# EAGLE board e-ink-display-v120 (EAGLE 9.2.2)
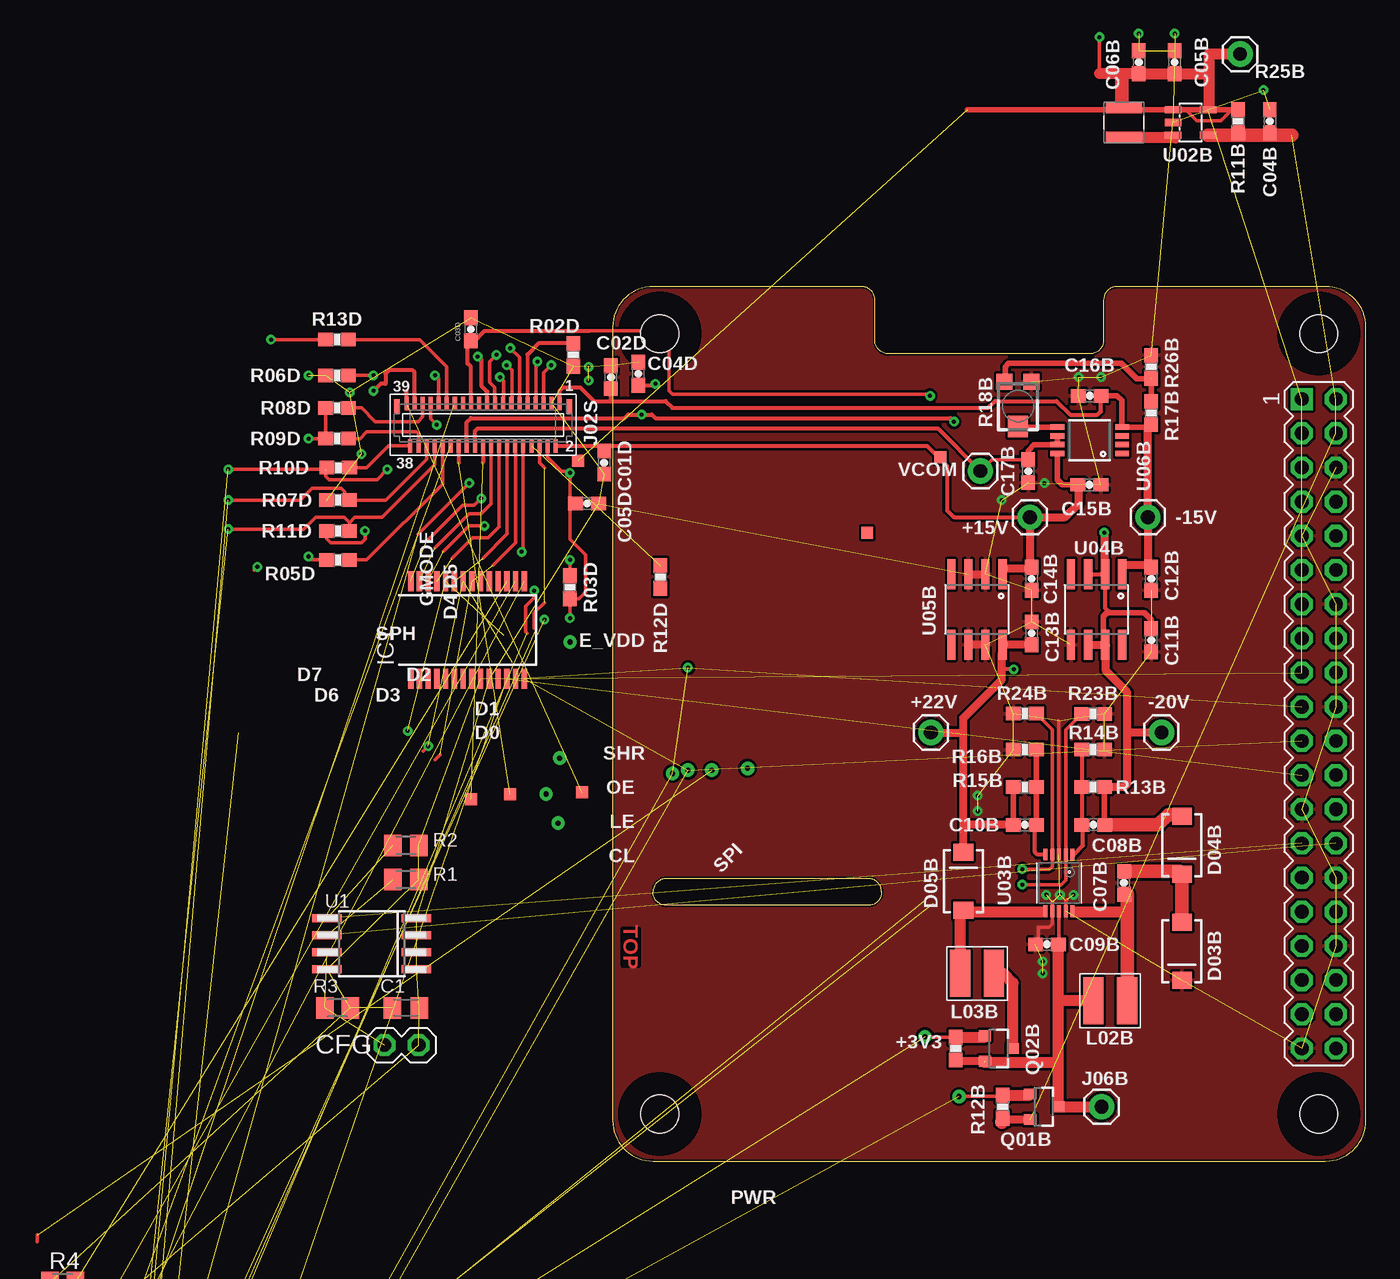
[diagram p0: board, top side]
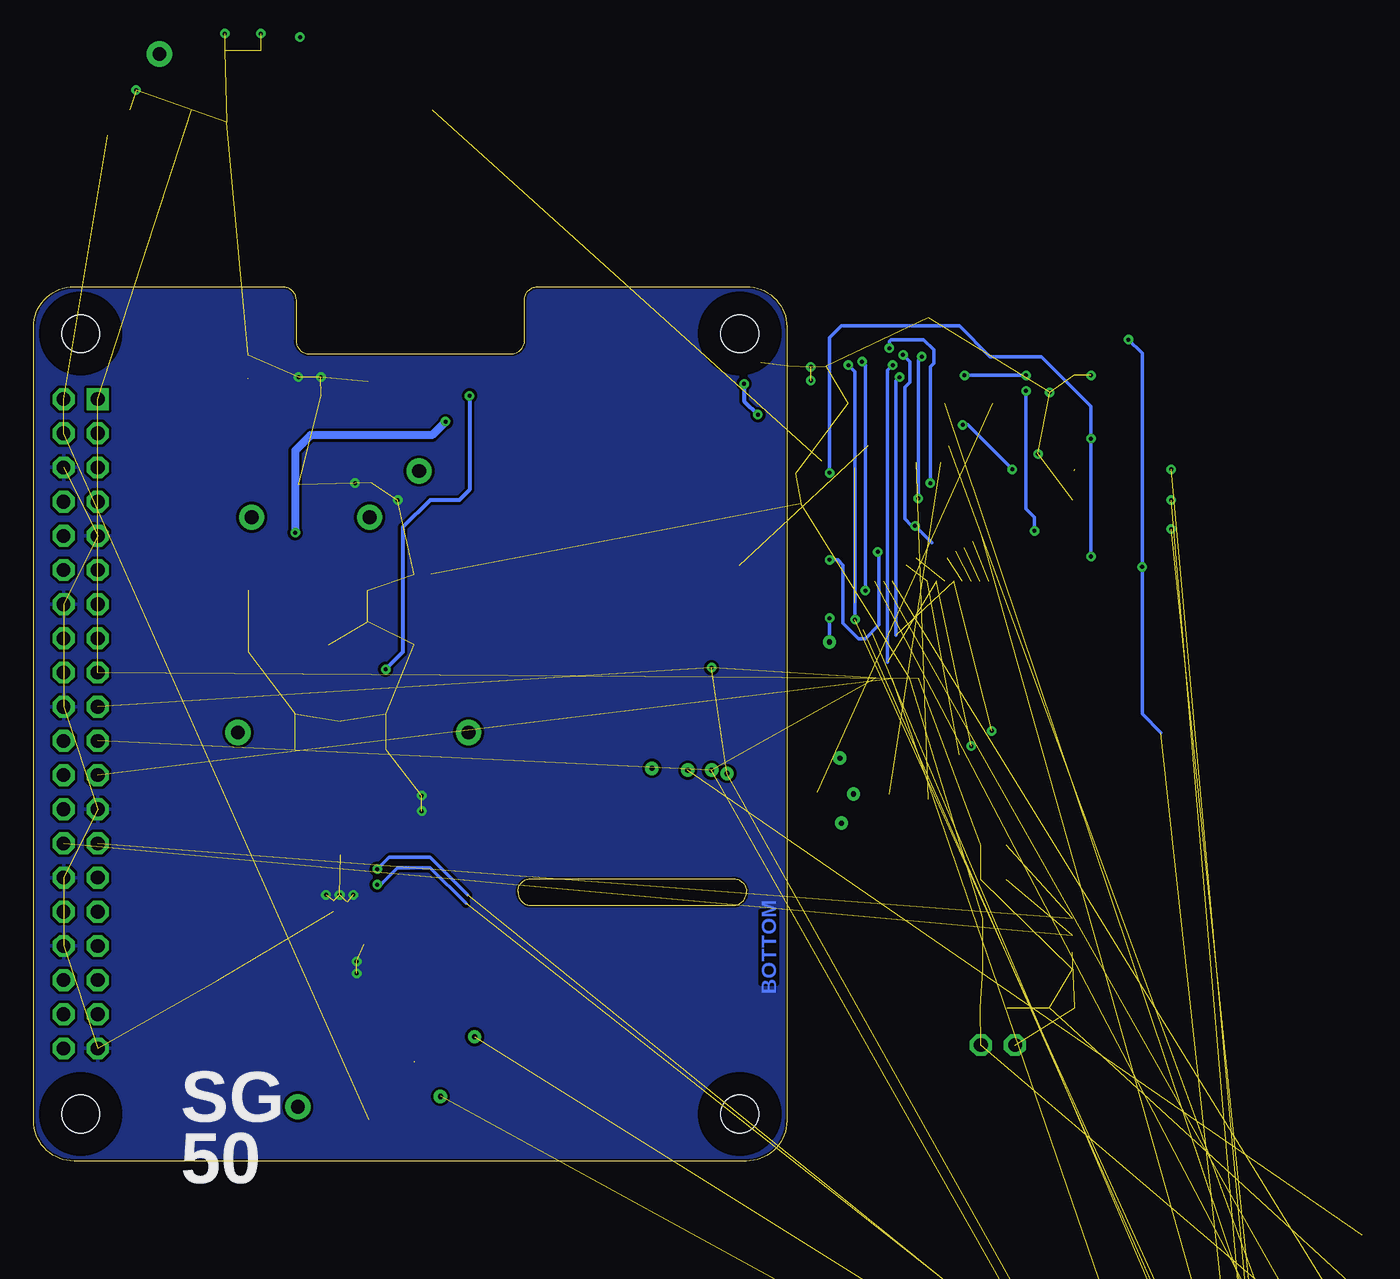
[diagram p1: board, bottom side, seen from below]

Size 56 x 65 mm. Coordinates in mm from the lower left corner, seen from the top.
Outline: 3,65 arc90 0,62 0,3 arc90 3,0 53,0 arc90 56,3 56,62 arc90 53,65 37.5,65 arc90 36.5,64 36.5,61 arc-90 35.5,60 20.5,60 arc-90 19.5,61 19.5,64 arc90 18.5,65 3,65
Outline: 19,21 4,21 arc90 3,20 arc90 4,19 19,19 arc90 20,20 arc90 19,21
Copper layers (1+2*15+16): Top 0.018mm / dielectric 0.195mm / Route2 0.035mm / dielectric 1.1mm / Route15 0.035mm / dielectric 0.195mm / Bottom 0.018mm
Design rules "spark-4layer": minimum track width 6mil, minimum drill 0.3mm, track to track 6mil, track to pad 6mil, pad to pad 6mil, via to via 6mil, smd to smd 6mil, copper to edge 6mil, drill to drill 6mil, minimum pad ring 12mil, minimum via ring 8mil, stop-mask expansion 4mil, vias tented up to drill 20mil, thermal gap 8mil
Net classes: 0 default: clearance 0.205 mm
Holes 2.8 mm at 3.5,61.5 52.5,61.5 52.5,3.5 3.5,3.5
tRestrict: area 51,60 to 54,63; area 51,1.9 to 54,5.1; area 2,1.9 to 5,5.1; area 2,60 to 5,63
bRestrict: area 2,60 to 5,63; area 51,60 to 54,63; area 2,1.9 to 5,5.1; area 51,1.9 to 54,5.1
Milling: 6 lines

## Footprints (pad centres in the part's own frame; a part is rotated, then mirrored left to right if it is on the bottom)
C0805K = smd 1.3 x 1.6: 1 -1,0; 2 1,0
0603-CAP = smd 1.1 x 1: 1 -0.85,0; 2 0.85,0
PIN_W_2 = drill 1.016 octagon: 1 0,0; 2 0,-2.54
SMA-DIODE = smd 1.27 x 1.47: A -2.15,0; C 2.15,0
SSOP28 = smd 0.4 x 1.5: 1 -4.225,-3.625; 2 -3.575,-3.625; 3 -2.925,-3.625; 4 -2.275,-3.625; 5 -1.625,-3.625; 6 -0.975,-3.625; 7 -0.325,-3.625; 8 0.325,-3.625; 9 0.975,-3.625; 10 1.625,-3.625; 11 2.275,-3.625; 12 2.925,-3.625; 13 3.575,-3.625; 14 4.225,-3.625; 15 4.225,3.625; 16 3.575,3.625; 17 2.925,3.625; 18 2.275,3.625; 19 1.625,3.625; 20 0.975,3.625; 21 0.325,3.625; 22 -0.325,3.625; 23 -0.975,3.625; 24 -1.625,3.625; 25 -2.275,3.625; 26 -2.925,3.625; 27 -3.575,3.625; 28 -4.225,3.625
SSOP24 = smd 0.4 x 1.2: 1 -3.575,-3.42; 2 -2.925,-3.42; 3 -2.275,-3.42; 4 -1.625,-3.42; 5 -0.975,-3.42; 6 -0.325,-3.42; 7 0.325,-3.42; 8 0.975,-3.42; 9 1.625,-3.42; 10 2.275,-3.42; 11 2.925,-3.42; 12 3.575,-3.42; 13 3.575,3.42; 14 2.925,3.42; 15 2.275,3.42; 16 1.625,3.42; 17 0.975,3.42; 18 0.325,3.42; 19 -0.325,3.42; 20 -0.975,3.42; 21 -1.625,3.42; 22 -2.275,3.42; 23 -2.925,3.42; 24 -3.575,3.42
FPC-0.3-39 = smd 0.3 x 1: 1 -1.2,-1.45; 2 -0.89,1.7; 3 -0.6,-1.45; 4 -0.29,1.7; 5 0,-1.45; 6 0.31,1.7; 7 0.6,-1.45; 8 0.91,1.7; 9 1.2,-1.45; 10 1.51,1.7; 11 1.8,-1.45; 12 2.11,1.7; 13 2.4,-1.45; 14 2.71,1.7; 15 3,-1.45; 16 3.31,1.7; 17 3.6,-1.45; 18 3.91,1.7; 19 4.2,-1.45; 20 4.51,1.7; 21 4.8,-1.45; 22 5.11,1.7; 23 5.4,-1.45; 24 5.71,1.7; 25 6,-1.45; 26 6.31,1.7; 27 6.6,-1.45; 28 6.91,1.7; 29 7.2,-1.45; 30 7.51,1.7; 31 7.8,-1.45; 32 8.11,1.7; 33 8.4,-1.45; 34 8.71,1.7; 35 9,-1.45; 36 9.31,1.7; 37 9.6,-1.45; 38 9.91,1.7; 39 10.2,-1.45 | smd 0.4 x 1: H1 -1.9,-1.25; H2 10.9,-1.25
1X01 = drill 1.016 pad 1.88: 1 0,0
PIN_20X2 = drill 1.016 square: 1 -24.13,-1.27 | drill 1.016 octagon: 2 -24.13,1.27; 3 -21.59,-1.27; 4 -21.59,1.27; 5 -19.05,-1.27; 6 -19.05,1.27; 7 -16.51,-1.27; 8 -16.51,1.27; 9 -13.97,-1.27; 10 -13.97,1.27; 11 -11.43,-1.27; 12 -11.43,1.27; 13 -8.89,-1.27; 14 -8.89,1.27; 15 -6.35,-1.27; 16 -6.35,1.27; 17 -3.81,-1.27; 18 -3.81,1.27; 19 -1.27,-1.27; 20 -1.27,1.27; 21 1.27,-1.27; 22 1.27,1.27; 23 3.81,-1.27; 24 3.81,1.27; 25 6.35,-1.27; 26 6.35,1.27; 27 8.89,-1.27; 28 8.89,1.27; 29 11.43,-1.27; 30 11.43,1.27; 31 13.97,-1.27; 32 13.97,1.27; 33 16.51,-1.27; 34 16.51,1.27; 35 19.05,-1.27; 36 19.05,1.27; 37 21.59,-1.27; 38 21.59,1.27; 39 24.13,-1.27; 40 24.13,1.27
INDUCTOR-NR3015 = smd 0.8 x 2.7: 1 -1.1,0; 2 1.1,0
4040(1515) = smd 1.5 x 3.5: P$1 1.25,0; P$2 -1.25,0
SOT23-3 = smd 0.8 x 0.9: 1 -0.95,-1; 2 0.95,-1; 3 0,1.1
M0805 = smd 1.3 x 1.6: 1 -0.95,0; 2 0.95,0
0603-RES = smd 1.1 x 1: 1 -0.85,0; 2 0.85,0
TC33X = smd 1.2 x 1.2: 1 -1,-1.825; 3 1,-1.825 | smd 1.5 x 1.6: 2 0,1.5
SJ_2S-NO = smd 0.635 x 1.27: 1 -0.45,0; 2 0.45,0
TP-RD_15TH = drill 0.381 pad 0.61: P$1 0,0
TP35_BOT = smd 0.889 x 0.889 bottom: P$1 0,0
TP_15TH = drill 0.381 pad 0.61: P$1 0,0
SOIC8 = smd 0.6 x 2.2: 1 -1.905,-3.33; 2 -0.635,-3.33; 3 0.635,-3.33; 4 1.905,-3.33; 5 1.905,3.33; 6 0.635,3.33; 7 -0.635,3.33; 8 -1.905,3.33
SOT23-5 = smd 0.55 x 1.2: 1 -0.95,-1.3; 2 0,-1.3; 3 0.95,-1.3; 4 0.95,1.3; 5 -0.95,1.3
MSOP-10 = smd 0.305 x 0.889: 1 -1,-2.11; 2 -0.5,-2.11; 3 0,-2.11; 4 0.5,-2.11; 5 1,-2.11; 6 1,2.11; 7 0.5,2.11; 8 0,2.11; 9 -0.5,2.11; 10 -1,2.11
SO08 = smd 0.61 x 2.21: 1 -1.905,-2.616; 2 -0.635,-2.616; 3 0.635,-2.616; 4 1.905,-2.616; 5 1.905,2.616; 6 0.635,2.616; 7 -0.635,2.616; 8 -1.905,2.616
MSOP-8 = smd 0.41 x 1.02: 1 -0.975,-2.4; 2 -0.325,-2.4; 3 0.325,-2.4; 4 0.975,-2.4; 5 0.975,2.4; 6 0.325,2.4; 7 -0.325,2.4; 8 -0.975,2.4

## Placement (x,y rotation side)
C1  100nF  [C0805K]  -15.38,11.39 0 top  (outside the outline)
C01D  100nF  [0603-CAP]  -0.64,51.92 270 top
C02D  100nF  [0603-CAP]  -0.13,58.27 90 top
C03D  100nF  [0603-CAP]  -10.54,61.83 90 top  (outside the outline)
C04B  4.7uF, 25V, X5R  [0603-CAP]  48.86,77.28 270 top  (outside the outline)
C04D  100nF  [0603-CAP]  1.9,58.52 90 top
C05B  22uF, 25V, X5R  [0603-CAP]  41.78,81.67 270 top  (outside the outline)
C05D  100nF  [0603-CAP]  -1.91,48.87 0 top
C06B  0.1uF, 25V, X5R  [0603-CAP]  39.12,81.67 270 top  (outside the outline)
C07B  0.1uF, 50V, X5R  [0603-CAP]  38.01,20.68 90 top
C08B  100pf, 50V, X5R  [0603-CAP]  35.72,25 0 top
C09B  4.7uF, 50V, X5R  [0603-CAP]  32.29,16.11 0 top
C10B  4.7pf, 50V, X5R  [0603-CAP]  30.64,25 180 top
C11B  1uF, 50V, X5R  [0603-CAP]  40.04,38.71 90 top
C12B  0.1uF, 50V, X5R  [0603-CAP]  40.04,43.28 90 top
C13B  1uF, 50V, X5R  [0603-CAP]  31.15,39.22 270 top
C14B  0.1uF, 50V, X5R  [0603-CAP]  31.15,43.28 90 top
C15B  0.1uF, 25V, X5R  [0603-CAP]  35.44,50.27 180 top
C16B  0.1uF, 25V, X5R  [0603-CAP]  35.47,56.87 0 top
C17B  0.1uF, 25V, X5R  [0603-CAP]  30.9,51.28 90 top
CFG  [PIN_W_2]  -16.97,8.62 90 top  (outside the outline)
D03B  SS24T3G  [SMA-DIODE]  42.33,15.6 270 top
D04B  SS24T3G  [SMA-DIODE]  42.33,23.47 270 top
D05B  SS24T3G  [SMA-DIODE]  26.07,20.8 90 top
IC1  MCP23S17SS  [SSOP28]  -10.8,39.47 0 top  (outside the outline)
IC2  MCP23S17SS  [SSOP28]  -35.56,-32.54 0 top  (outside the outline)
IC3  IC_BUFF_SN74LVC8T245-SSOP24  [SSOP24]  -50.42,-46.89 0 top  (outside the outline)
J02S  EINKED060SC4  [FPC-0.3-39]  -5.14,54.86 180 top  (outside the outline)
J05B  [1X01]  46.65,82.27 180 top  (outside the outline)
J06B  [1X01]  36.36,4.04 90 top
J07B  [1X01]  40.8,31.85 90 top
J08B  [1X01]  23.66,31.85 90 top
J09B  [1X01]  39.79,47.86 90 top
J10B  [1X01]  31.02,47.86 90 top
J11B  [1X01]  27.34,51.28 180 top
K1  PIN20X2  [PIN_20X2]  52.5,32.5 270 top
L01B  2.2uH - NR3015T2R2M  [INDUCTOR-NR3015]  38.01,77.19 90 top  (outside the outline)
L02B  22uH  [4040(1515)]  36.99,11.91 180 top
L03B  22uH  [4040(1515)]  27.09,13.95 0 top
Q01B  IRLML6402PbF  [SOT23-3]  32.04,4.04 270 top
Q02B  IRLML6402PbF  [SOT23-3]  28.67,8.36 270 top
R1  3k9  [M0805]  -15.38,20.92 0 top  (outside the outline)
R2  3k9  [M0805]  -15.38,23.46 0 top  (outside the outline)
R02D  0 Ohm  [0603-RES]  -2.92,59.92 270 top
R3  1k  [M0805]  -20.46,11.39 0 top  (outside the outline)
R03D  0 Ohm  [0603-RES]  -3.18,42.65 90 top  (outside the outline)
R4  3k9  [M0805]  -40.89,-9.04 0 top  (outside the outline)
R04D1  0 Ohm  [0603-RES]  -40.13,-25.55 0 top  (outside the outline)
R5  3k9  [M0805]  -40.89,-14.76 0 top  (outside the outline)
R05D  0 Ohm  [0603-RES]  -20.42,44.68 0 top  (outside the outline)
R6  3k9  [M0805]  -40.89,-20.47 0 top  (outside the outline)
R06D  0 Ohm  [0603-RES]  -20.49,58.4 0 top  (outside the outline)
R7  3k9  [M0805]  -40.89,-39.9 0 top  (outside the outline)
R07D  0 Ohm  [0603-RES]  -20.42,49.12 180 top  (outside the outline)
R8  3k9  [M0805]  -36.45,-39.9 0 top  (outside the outline)
R08D  0 Ohm  [0603-RES]  -20.49,55.98 0 top  (outside the outline)
R9  3k9  [M0805]  -32,-39.9 0 top  (outside the outline)
R09D  0 Ohm  [0603-RES]  -20.49,53.7 0 top  (outside the outline)
R10D  0 Ohm  [0603-RES]  -20.4,51.54 180 top  (outside the outline)
R11B  100K, 1%  [0603-RES]  46.48,77.28 270 top  (outside the outline)
R11D  0 Ohm  [0603-RES]  -20.42,46.84 0 top  (outside the outline)
R12B  10K, 1%  [0603-RES]  28.99,4.04 270 top
R12D  0 Ohm  [0603-RES]  3.55,43.42 270 top
R13B  470K, 1%  [0603-RES]  35.72,27.79 0 top
R13D  0 Ohm  [0603-RES]  -20.49,61.06 0 top  (outside the outline)
R14B  33K, 1%  [0603-RES]  35.72,30.58 180 top
R15B  560K, 1%  [0603-RES]  30.64,27.79 180 top
R16B  33K, 1%  [0603-RES]  30.64,30.58 0 top
R17B  200K, 1%  [0603-RES]  40.04,55.6 270 top
R18B  100K, 25%  [TC33X]  30.13,56.11 180 top
R23B  0 Ohm  [0603-RES]  35.72,33.24 0 top
R24B  0 Ohm  [0603-RES]  30.64,33.26 180 top
R25B  10K, 1%  [0603-RES]  25.49,8.36 270 top
R26B  DNP  [0603-RES]  40.04,59.03 270 top
SJ1  [SJ_2S-NO]  -44.45,-40.54 0 top  (outside the outline)
SJ2  [SJ_2S-NO]  -47.37,-40.54 0 top  (outside the outline)
SJ3  [SJ_2S-NO]  -50.29,-40.54 0 top  (outside the outline)
SJ4  [SJ_2S-NO]  -53.21,-40.54 0 top  (outside the outline)
TP1  [TP-RD_15TH]  25.76,4.8 180 top
TP01B  TP1  [TP35_BOT]  -2.58,52.05 0 bottom
TP01M  [TP-RD_15TH]  -3.18,38.58 180 top  (outside the outline)
TP2  [TP-RD_15TH]  23.22,9.25 180 top
TP02M  [TP-RD_15TH]  4.45,28.8 180 top
TP03M  TEST-POINTTP_15TH_THRU  [TP_15TH]  5.59,29.06 180 top
TP04M  [TP-RD_15TH]  7.37,29.06 180 top
TP05M  [TP-RD_15TH]  10.03,29.19 180 top
TP06M  [TP-RD_15TH]  -3.94,29.95 180 top  (outside the outline)
TP07M  [TP-RD_15TH]  -4.95,27.28 180 top  (outside the outline)
TP08M  [TP-RD_15TH]  -4.06,25.12 180 top  (outside the outline)
TP17M  TP1  [TP35_BOT]  18.92,46.71 0 bottom
TP18M  TP1  [TP35_BOT]  24.38,52.3 0 bottom
U1  EEPROM24  [SOIC8]  -17.92,16.15 90 top  (outside the outline)
U02B  R8008-33  [SOT23-5]  42.96,77.19 270 top  (outside the outline)
U03B  LT1945-IMS#PBF  [MSOP-10]  33.18,20.68 180 top
U04B  LM79L15  [SO08]  35.98,41 180 top
U05B  LM78L15  [SO08]  27.09,41 180 top
U06B  LM358-DGKR  [MSOP-8]  35.47,53.57 90 top
U$1  TP1  [TP35_BOT]  -10.54,26.9 0 bottom  (outside the outline)
U$8  TP1  [TP35_BOT]  -7.62,27.28 0 bottom  (outside the outline)
U$9  TP1  [TP35_BOT]  -2.29,27.41 0 bottom

## Library data of the parts
C1 = resistor; DIELECTRIC: X7R
C01D C02D C03D C04B C04D C05B C05D C06B C07B C08B C09B C10B C11B C12B C13B C14B C15B C16B C17B = SparkFun-Capacitors
CFG K1 U1 = FLYFISH
D03B D04B D05B J02S L02B L03B R02D R03D R04D1 R05D R06D R07D R08D R09D R10D R11B R11D R12B R12D R13B R13D R14B R15B R16B R17B R23B R24B R25B R26B TP1 TP01M TP2 TP02M TP04M TP05M TP06M TP07M TP08M U03B U04B U05B U06B = kennethlimcp
IC1 IC2 = microchip; MF: MICROCHIP; MPN: MCP23S17-E/SS; OC_FARNELL: 1467675; OC_NEWARK: 31K2952
IC3 = Monkey_Wrench_Manufacturing_Official
J05B J06B J07B J08B J09B J10B J11B = SparkFun-Connectors
L01B = Spark; NR3015T4R7M: 4.7uH
Q01B Q02B = SparkFun-DiscreteSemi
R1-R9 = resistor; TOLERANCE: 5%
R18B = adafruit
SJ1-SJ4 = SuperPi
TP01B TP17M TP18M U02B U$1 U$8 U$9 = Spark
TP03M = SparkFun-Passives

## Nets
+3V3: C1.1 C05B.2 C06B.2 IC1.9 IC2.9 J05B.1 K1.1 K1.17 L01B.2 R1.2 R2.2 R3.2 R4.1 U1.8 U02B.5
+5V: C04B.2 K1.2 K1.4 Q01B.2 R11B.2 R12B.2 U02B.4
+15V: C01D.1 C14B.2 C15B.2 J02S.2 J10B.1 U05B.1 U06B.8
+22V: C03D.1 C10B.2 C13B.2 D05B.C J02S.23 J08B.1 R15B.2 U05B.8
-15V: C02D.1 C12B.2 C16B.2 J02S.1 J09B.1 R17B.2 U04B.1 U06B.4
-20V: C04D.1 C08B.2 C11B.2 D04B.A J02S.24 J07B.1 R13B.2 U04B.2 U04B.3 U04B.6 U04B.7
BM_CHG: TP08M.P$1
BM_PGOOD: TP07M.P$1
CE2: J02S.10 R03D.2
EINK_CKV: IC2.6 J02S.33 R10D.2
EINK_CL: IC2.1 J02S.5
EINK_D0: IC1.21 J02S.12
EINK_D1: IC1.22 J02S.13
EINK_D2: IC1.23 J02S.14
EINK_D3: IC1.24 J02S.15
EINK_D4: IC1.25 J02S.16
EINK_D5: IC1.26 J02S.17
EINK_D6: IC1.27 J02S.18
EINK_D7: IC1.28 J02S.19
EINK_GMODE: IC2.7 J02S.28 R04D1.1
EINK_LE: IC2.2 J02S.6
EINK_OE: IC2.3 J02S.7
EINK_RL: IC2.8 R13D.1
EINK_SHR: R12D.2
EINK_SPH: IC2.4 J02S.11
EINK_SPV: IC2.5 J02S.32 R11D.2
EINK_VBORDER: IC2.21 J02S.34 R07D.1
EINK_VDD: C05D.1 J02S.4 R03D.1 R05D.1 R08D.1 R09D.1 TP01M.P$1
FB2: C10B.1 R15B.1 R16B.2 U03B.5
GND: C1.2 C01D.2 C02D.2 C03D.2 C04B.1 C04D.2 C05B.1 C05D.2 C06B.1 C09B.1 C11B.1 C12B.1 C13B.1 C14B.1 C15B.1 C16B.1 C17B.1 CFG.2 D03B.C IC1.10 IC2.10 J02S.3 K1.6 K1.9 K1.14 K1.20 K1.25 K1.30 K1.34 K1.39 R02D.2 R5.1 R6.1 R06D.1 R7.1 R07D.2 R8.1 R9.1 R14B.1 R16B.1 R18B.1 R23B.2 R24B.2 R26B.1 U1.1 U1.2 U1.3 U1.4 U02B.2 U03B.3 U03B.7 U03B.9 U04B.5 U05B.2 U05B.3 U05B.6 U05B.7
GND1: IC3.11
GND2: IC3.12
GND3: IC3.13
MCU_SCL: TP18M.P$1
MCU_SDA: TP17M.P$1
N$1: IC2.17 R7.2
N$2: C07B.1 L02B.P$2 U03B.10
N$3: C07B.2 D03B.A D04B.C
N$4: K1.28 R1.1 U1.6
N$5: J02S.31 R06D.2
N$6: R18B.2 U06B.5
N$7: K1.27 R2.1 U1.5
N$8: D05B.A L03B.P$2 U03B.6
N$9: CFG.1 R3.1 U1.7
N$10: IC1.17 R4.2
N$11: IC1.16 R5.2 SJ4.2
N$12: IC1.15 R6.2 SJ3.2
N$13: J02S.27 R04D1.2
N$14: IC2.16 R8.2 SJ2.2
N$15: IC2.15 R9.2 SJ1.2
N$17: K1.29
N$18: K1.31
N$19: K1.33
N$20: K1.35
N$21: R11B.1 TP01B.P$1 U02B.1
N$22: K1.37
N$23: L01B.1 U02B.3
N$24: J02S.29 R13D.2
N$25: L03B.P$1 Q02B.3
N$26: J02S.35 R08D.2
N$27: J02S.36 R09D.2
N$28: J02S.9 R02D.1
N$29: J02S.20 U$1.P$1
N$30: K1.32
N$31: J02S.26 U$8.P$1
N$32: J02S.8 R12D.1
N$33: J02S.39 U$9.P$1
N$34: K1.36
N$35: K1.38
N$36: R17B.1 R18B.3 R26B.2
NEG_EN: IC2.24 R23B.1 U03B.2
NFB1: C08B.1 R13B.1 R14B.2 U03B.1
POS_CTRL: IC2.25 Q02B.1 R25B.1 TP2.P$1
POS_EN: IC2.23 R24B.1 U03B.4
SD_CS: TP05M.P$1
SMPS_CTRL: IC2.22 Q01B.1 R12B.1 TP1.P$1
SPI_CE0_N: K1.24
SPI_CE1_N: K1.26
SPI_CLK: IC1.12 IC2.12 K1.23
SPI_MISO: IC1.14 IC2.14 K1.21 TP03M.P$1
SPI_MOSI: IC1.13 IC2.13 K1.19 TP02M.P$1
SPI_SCK: TP04M.P$1
U1CE2: J02S.30 R05D.2
U2CKV: J02S.38 R10D.1
U2SPV: J02S.37 R11D.1
USB_DISC: TP06M.P$1
VCCA: IC3.1
VCCB1: IC3.24
VCCB2: IC3.23
VCOM: C17B.2 J02S.22 J11B.1 U06B.6 U06B.7
VIN: C09B.2 J06B.1 L02B.P$1 Q01B.3 Q02B.2 R25B.2 U03B.8

## Tracks (layer width: path | path; a pad name or v marks a point on that pad's centre or on a via)
+3V3  (via drill 0.3)  (10 unrouted)
  Top 0.254: v36.19,83.54 36.19,80.82 | 37.34,80.88 37.85,80.88 37.85,80.82
  Top 0.305: 44.32,78.34 44.26,78.34 U02B.5 | 37.85,78.46 38.01,78.46 L01B.2
  Top 0.406: 37.85,80.82 37.85,80.37 | 37.08,80.82 37.34,80.82 37.34,80.88
  Top 0.813: 44.32,80.82 C05B.2 C06B.2 37.85,80.82 37.08,80.82 36.19,80.82 | 44.32,80.82 44.32,78.34 | J05B.1 44.32,82.27 44.32,80.82
  Top 1.016: 37.85,78.46 37.85,80.37
  Bottom 0.254: 36.07,83.42 v36.19,83.54
+5V  (3 unrouted)
  Top 0.305: 44.19,76.17 U02B.4 | C04B.2 49.53,76.43 49.53,76.24 | R11B.2 47.24,76.43 47.24,76.24
  Top 0.61: Q01B.2 29.09,3.09 R12B.2
  Top 1.016: U02B.4 47.24,76.24 49.53,76.24 50.48,76.24 | 28.95,2.9 R12B.2
+15V
  Top 0.254: C01D.1 -0.64,53.16
  Top 0.305: J02S.2 -0.64,53.16 23.38,53.16 24.87,51.67 24.87,48.36 25.38,47.86 J10B.1
  Top 0.406: U06B.8 33.07,50.64 33.44,50.27 C15B.2
  Top 0.61: U05B.1 28.99,43.92 29.12,44.05 31.06,44.05 C14B.2 31.02,44.13 J10B.1 33.63,47.86 34.65,48.87 34.65,50.22 C15B.2
+22V  (via drill 0.3)
  Top 0.254: 23.47,56.75 v23.6,56.87 23.47,57 4.45,57 4.19,57.25 4.19,60.56 3.05,61.7 -1.78,61.7
  Top 0.305: J02S.23 -10.54,59.03 -10.8,59.28 -10.8,60.72 C03D.1 -10.25,60.98 -9.53,61.7 -1.78,61.7 | v29.82,36.55 28.93,36.55 | 28.93,37.69 28.93,38.32 U05B.8
  Top 0.406: R15B.2 C10B.2
  Top 0.61: D05B.C 26.07,25 | 26.07,25 26.07,31.85 | C10B.2 26.07,25 | J08B.1 26.07,31.85 | C13B.2 29,38.37 U05B.8 | 26.07,31.85 26.07,32.93 28.93,35.79 28.93,36.55 28.93,37.69
  Bottom 0.305: v23.6,56.87 23.6,49.89 24.36,49.12 26.52,49.12 28.55,47.09 28.55,37.82 v29.82,36.55
-15V
  Top 0.305: 38.01,44.3 38.01,43.74 U04B.1 | J02S.1 -3.94,57.25 -3.68,57.51 -2.41,57.51 -1.4,56.49 -0.13,56.49 | C16B.2 36.3,56.85 36.3,55.73 36.04,55.48 34.01,55.48 32.99,56.49 28.42,56.49 27.91,55.98 4.45,55.98 3.94,56.49 -0.13,56.49 | -0.13,56.49 C02D.1
  Top 0.406: C16B.2 37.5,56.87 37.84,56.53 37.84,54.8 37.87,54.77 U06B.4 39.83,54.55 R17B.2
  Top 0.61: 38.01,44.3 40.04,44.3 C12B.2 39.79,44.13 J09B.1 39.79,54.5 R17B.2
-20V  (via drill 0.3)
  Top 0.305: U04B.3 U04B.2 | U04B.2 36.61,41.12 36.99,40.74 | J02S.24 -10.85,54.92 -10.54,55.22 0.89,55.22 1.14,55.48 v2.16,55.48 2.92,55.48 3.17,55.22 25.12,55.22 v25.38,54.97 | 36.55,43.68 U04B.2 | C04D.1 3.09,57.67 v3.17,57.76
  Top 0.406: R13B.2 C08B.2 | C11B.2 40.04,40.23 39.53,40.74 36.99,40.74 36.74,40.74 36.48,40.49 36.48,38.51 U04B.7
  Top 0.61: U04B.6 U04B.7 36.68,38.31 36.68,36.42 38.26,34.84 38.26,31.85 | R13B.2 38.01,27.79 38.26,28.04 38.26,31.85 | J07B.1 38.26,31.85 | v36.55,46.71 36.55,43.68
  Top 1.016: C08B.2 40.55,25 41.31,25.76 42.19,25.76 D04B.A
  Bottom 0.305: v3.17,57.76 3.17,56.49 v2.16,55.48
  Bottom 0.61: v25.38,54.97 26.39,53.95 35.41,53.95 36.55,52.81 v36.55,46.71
CE2  (via drill 0.3)
  Top 0.254: v-3.18,44.68 R03D.2 | J02S.10 -6.65,45.4 v-6.77,45.27
  Bottom 0.254: -6.65,45.4 v-6.77,45.27 -6.86,45.19 -6.86,39.85 -5.84,38.84 -5.33,38.84 -4.19,39.98 -4.19,44.3 -3.81,44.68 v-3.18,44.68
EINK_CKV  (via drill 0.3)  (2 unrouted)
  Top 0.254: J02S.33 -13.54,55.17 v-13.08,54.71 | v-16.76,51.41 -17.53,50.65 -21.08,50.65 -21.34,50.9 -21.34,51.33 | v-28.58,51.41 -21.38,51.41 R10D.2
  Bottom 0.254: v-13.08,54.71 -13.46,54.71 v-16.76,51.41
EINK_CL  (via drill 0.3)  (1 unrouted)
  Top 0.254: J02S.5 -5.14,58.59 v-4.57,59.16
  Bottom 0.254: v-5.08,40.23 -5.08,58.65 v-4.57,59.16
EINK_D0  (2 unrouted)
  Top 0.254: -13.21,29.82 -12.83,30.2 | J02S.12 -7.24,45.95 -8.89,44.3
EINK_D1  (via drill 0.3)  (2 unrouted)
  Top 0.254: -14.1,30.46 v-13.72,30.84 | v-7.87,59.16 -7.49,58.78 -7.49,56.35 J02S.13
  Bottom 0.254: -7.49,37.06 -7.49,58.78 v-7.87,59.16
EINK_D2  (1 unrouted)
  Top 0.254: J02S.14 -7.85,46.61 -9.65,44.81
EINK_D3  (via drill 0.3)  (2 unrouted)
  Top 0.254: v-8.38,58.27 -8.13,58.02 -8.13,56.32 J02S.15
  Bottom 0.254: -8.13,39.09 -8.13,58.02 v-8.38,58.27
  other vias: -15.24,31.98
EINK_D4  (1 unrouted)
  Top 0.254: J02S.16 -8.45,47.16 -9.27,46.33 -10.41,46.33 -11.94,44.81
EINK_D5  (via drill 0.3)  (1 unrouted)
  Top 0.254: -12.57,45.31 -10.67,47.22 v-9.53,47.22 | v-8.64,59.92 -9.14,59.41 -9.14,57.89 -8.76,57.51 -8.76,56.33 J02S.17
  Bottom 0.254: v-8.64,59.92 -9.14,59.41 -9.14,57.89 -8.76,57.51 -8.76,47.73 -9.27,47.22 v-9.53,47.22 -10.8,45.95
EINK_D6  (1 unrouted)
  Top 0.254: J02S.18 -9.05,48.84 -9.78,48.11 -10.67,48.11 -13.21,45.57
EINK_D7  (via drill 0.3)  (1 unrouted)
  Top 0.254: -13.84,46.08 -11.18,48.74 -10.29,48.74 v-9.78,49.25
  Top 0.305: v-10.03,59.79 -9.78,59.54 -9.78,57.63 -9.34,57.19 J02S.19
  Bottom 0.254: v-9.78,49.25 -9.78,59.54 v-10.03,59.79
EINK_GMODE  (2 unrouted)
EINK_LE  (2 unrouted)
  Top 0.254: J02S.6 -5.45,51.91 -5.08,51.54 | -5.08,41.5 -5.84,40.74 -5.84,39.6 -5.72,39.47
EINK_OE  (via drill 0.3)  (1 unrouted)
  Top 0.254: J02S.7 -5.72,56.33 -5.72,59.28 v-5.59,59.41 -5.59,59.28 | v-5.84,42.39 -5.84,41.89 -6.48,41.25 -6.48,39.35 -6.35,39.22
  Bottom 0.254: v-5.84,42.39 -5.84,59.16 v-5.59,59.41
EINK_RL  (via drill 0.3)  (1 unrouted)
  Top 0.254: v-25.4,61.06 R13D.1 | -26.67,43.92 v-26.42,44.17
  Bottom 0.254: -27.81,31.85 -26.42,33.25 v-26.42,44.17 -26.42,60.04 v-25.4,61.06
EINK_SHR
  Top 0.254: 3.56,42.32 R12D.2
EINK_SPH  (via drill 0.3)  (1 unrouted)
  Top 0.254: -14.48,46.58 v-10.67,50.39 | J02S.11 -6.94,59.75 v-7.62,60.43
  Bottom 0.254: v-10.67,50.39 -10.67,59.03 -10.92,59.28 -10.92,60.3 -10.16,61.06 -7.75,61.06 -7.62,60.94 v-7.62,60.43 -7.75,60.3
EINK_SPV  (via drill 0.3)  (1 unrouted)
  Top 0.254: J02S.32 -13.25,51.75 -17.15,47.86 -19.18,47.86 -19.57,47.46 | R11D.2 -19.57,47.46 | v-28.58,46.97 -22.99,46.97 -22.1,47.86 -19.97,47.86 -19.57,47.46
EINK_VBORDER  (via drill 0.3)  (1 unrouted)
  Top 0.254: J02S.34 -13.85,52.17 -16.89,49.12 R07D.1 | v-28.58,49.12 -23.24,49.12 -22.35,50.01 -20.19,50.01 -19.94,49.76 -19.94,49.49 R07D.1 | -19.56,49.14 R07D.1
EINK_VDD  (via drill 0.3)
  Top 0.254: R09D.1 R08D.1 R09D.1 v-22.61,53.7 | R05D.1 -22.35,44.68 v-22.61,44.93 | J02S.4 -4.85,52.32 -3.81,51.28 -3.3,51.28 v-3.18,51.16 -3.18,48.87 -3.18,46.2 -2.03,45.06 -2.03,42.27 -2.5,41.8 R03D.1 v-3.18,40.36
  Top 0.305: C05D.1 -3.18,48.87
  Bottom 0.254: v-22.61,44.93 v-22.61,53.7 -22.61,56.11 -18.92,59.79 -15.11,59.79 -12.83,62.08 -4.06,62.08 -3.18,61.19 v-3.18,51.16 | TP01M.P$1 v-3.18,40.36
FB2
  Top 0.305: U03B.5 31.58,22.79 31.41,22.96 31.41,24.91 C10B.1
  Top 0.406: C10B.1 R15B.1 R16B.2
GND  (via drill 0.3)  (72 unrouted)
  Top 0.254: 31.66,16.32 31.66,17.38 32.42,17.38 32.68,17.64 U03B.7 32.68,19.22 32.74,19.28 | U03B.9 33.68,19.33 33.76,19.41 | U03B.3 33.18,32.68 33.12,32.74
  Top 0.305: 31.66,16.32 C09B.1
  Top 0.61: U05B.3 U05B.2 | U05B.7 U05B.6
  other vias: 48.39,79.61 39.12,83.8 32.23,19.79 33.25,19.79 34.26,19.79 31.98,14.84 31.98,13.95 27.15,26.01 27.15,27.15 34.65,58.27 36.3,58.27 32.11,50.39 28.93,49.12 -22.61,58.4 -19.56,57.13 -18.67,52.55 -1.78,59.03 -1.78,58.02 41.78,83.8
  pour Bottom: 3,65 arc90 0,62 0,3 arc90 3,0 53,0 arc90 56,3 56,62 arc90 53,65 37.5,65 arc90 36.5,64 36.5,61 arc-90 35.5,60 20.5,60 arc-90 19.5,61 19.5,64 arc90 18.5,65
  pour Top: 3,65 arc90 0,62 0,3 arc90 3,0 53,0 arc90 56,3 56,62 arc90 53,65 37.5,65 arc90 36.5,64 36.5,61 arc-90 35.5,60 20.5,60 arc-90 19.5,61 19.5,64 arc90 18.5,65
N$1  (1 unrouted)
N$2
  Top 0.254: 34.31,18.44 U03B.10
  Top 0.305: 38.26,12.68 38.26,11.93 L02B.P$2 | 34.44,18.52 34.23,18.52 U03B.10 | 38.14,18.52 arc90 38.26,18.64 38.26,19.41
  Top 0.813: 37.95,19.77 C07B.1 | 34.44,18.52 38.14,18.52
  Top 1.016: 38.26,12.68 38.26,19.41 38.26,19.83 C07B.1
N$3
  Top 0.61: D04B.C 42.33,20.68
  Top 1.016: 42.33,20.68 D03B.A | C07B.2 42.12,21.53 D04B.C
N$4  (2 unrouted)
N$5  (via drill 0.3)
  Top 0.254: R06D.2 v-17.78,58.4 | v-13.21,58.4 -12.95,58.14 -12.95,56.32 J02S.31
  Bottom 0.254: v-17.78,58.4 v-13.21,58.4
N$6
  Top 0.406: U06B.5 30.45,54.55 R18B.2
N$7  (2 unrouted)
N$8
  Top 0.254: U03B.6 31.9,18.57 31.85,18.52
  Top 0.61: D05B.A 26.25,18.78 26.52,18.52
  Top 0.813: L03B.P$2 25.84,18.55 D05B.A | 26.52,18.52 31.85,18.52
N$9  (2 unrouted)
N$10  (1 unrouted)
N$11  (2 unrouted)
N$12  (2 unrouted)
N$13  (1 unrouted)
N$14  (2 unrouted)
N$15  (2 unrouted)
N$21  (1 unrouted)
  Top 0.254: U02B.1 42.61,78.14 43.43,77.32 45.21,77.32 46.02,78.13 R11B.1
  Top 0.406: 46.52,78.13 R11B.1 26.38,78.13
N$23
  Top 0.254: L01B.1 37.38,76.09 37.34,76.05
  Top 0.305: 41.51,76.09 41.66,76.09 U02B.3
  Top 0.813: 41.51,76.09 41.85,76.05 37.34,76.05 37.21,76.05
N$24
  Top 0.254: R13D.2 -14.34,61.06 -12.34,59.05 J02S.29
N$25
  Top 0.813: Q02B.3 29.77,13.23 29.06,13.95 L03B.P$1
N$26
  Top 0.254: J02S.35 -14.14,55.31 -14.48,54.97 -17.65,54.97 -18.67,55.98 R08D.2
N$27
  Top 0.254: J02S.36 -14.45,54.05 -14.61,54.2 -18.29,54.2 -18.8,53.7 R09D.2
N$28
  Top 0.254: J02S.9 -6.34,59.93
  Top 0.305: -6.34,59.93 -5.46,60.81 -2.96,60.81 R02D.1
N$29  (1 unrouted)
  Top 0.305: J02S.20 -9.65,51.92
N$31  (1 unrouted)
  Top 0.305: J02S.26 -11.45,51.94
N$32  (1 unrouted)
  Top 0.254: 3.68,44.29 R12D.1 3.58,44.17
N$33  (1 unrouted)
  Top 0.305: J02S.39 -15.34,57.22
N$36  (1 unrouted)
  Top 0.254: 40.17,56.32 R17B.1
  Top 0.406: 40.04,56.81 R17B.1 40.06,56.47 40.06,58.14 38.96,58.14 37.82,59.28 29.44,59.28 29.19,59.03 29.19,57.98 R18B.3
NEG_EN  (via drill 0.3)  (1 unrouted)
  Top 0.254: v30.45,20.55 33.38,20.55 33.68,20.86 U03B.2 33.68,32.05 R23B.1
  Bottom 0.254: v30.45,20.55 30.2,20.55 28.93,21.82 26.52,21.82 23.85,19.15
NFB1
  Top 0.305: U03B.1 34.28,22.79 34.96,23.47 34.96,24.65 C08B.1 R13B.1 R14B.2
POS_CTRL  (2 unrouted)
  Top 0.254: R25B.1 23.18,9.21
  Top 0.813: R25B.1 27.7,9.21 Q02B.1
POS_EN  (via drill 0.3)  (1 unrouted)
  Top 0.254: v30.45,21.69 32.49,21.69 32.68,21.89 U03B.4 32.68,32.07 R24B.1
  Bottom 0.254: 23.72,19.79 26.52,22.58 29.57,22.58 v30.45,21.69
SMPS_CTRL  (1 unrouted)
  Top 0.254: TP1.P$1 28.9,4.8 R12B.1
  Top 0.305: 28.82,5.06 arc-90 R12B.1
  Top 0.813: R12B.1 30.94,4.89 Q01B.1
SPI_CLK  (2 unrouted)
SPI_MISO  (3 unrouted)
SPI_MOSI  (via drill 0.3)  (4 unrouted)
  other vias: 5.59,36.68
SPI_SCK  (1 unrouted)
  Top 0.254: -42.8,-5.49 -42.79,-5.5 -42.79,-5.99 -42.8,-5.98
U1CE2
  Top 0.254: J02S.30 -12.65,50.32 -18.29,44.68 R05D.2
U2CKV
  Top 0.254: J02S.38 -16.67,53.16 -18.29,51.54 R10D.1
U2SPV  (via drill 0.3)
  Top 0.254: R11D.1 -21.27,46.27 -20.96,45.95 -18.67,45.95 -18.42,46.2 v-18.42,46.84
  Top 0.305: J02S.37 -14.74,58.66 -14.86,58.78 -16.64,58.78 -16.89,58.52 -16.89,57.76 -17.27,57.76 v-17.78,57.25
  Bottom 0.254: v-17.78,57.25 -17.78,48.49 -18.42,47.86 v-18.42,46.84
VCOM
  Top 0.254: C17B.2 28.19,52.13 J11B.1
  Top 0.305: J02S.22 -10.25,54.25 -10.03,54.46 24.17,54.46 J11B.1
  Top 0.406: C17B.2 30.9,52.81 31.33,53.25 U06B.7 U06B.6
VIN  (1 unrouted)
  Top 0.254: U03B.8 33.18,16.14 C09B.2 | Q01B.3 33.14,6.94 32.74,7.34
  Top 0.61: Q02B.2 25.59,7.41 R25B.2
  Top 0.813: 27.66,7.34 32.74,7.34 | 33.14,11.79 Q01B.3 J06B.1 | 33.14,11.79 C09B.2 | L02B.P$1 33.27,11.91 33.14,11.79

## Text on the board
Top: TOP
Bottom: BOTTOM
tNames: VCOM | -15V | GMODE | +15V | D5 | D4 | SPH | E_VDD | D7 | D2 | D6 | D3 | D1 | +22V | -20V | D0 | SHR | OE | LE | CL | SPI | +3V3 | PWR
bNames: SG / 50
bValues: G | G